# Altium PCB mipi_test_brd_t0.PcbDoc
Units mil, origin at the board's own origin, x right, y up, seen from the top; angles counter-clockwise.
Board outline 1102.36 x 1240.16 mil, 2 copper layers (Top Layer, Bottom Layer); 2 components, 11 nets, 46 pads, 142 vias.
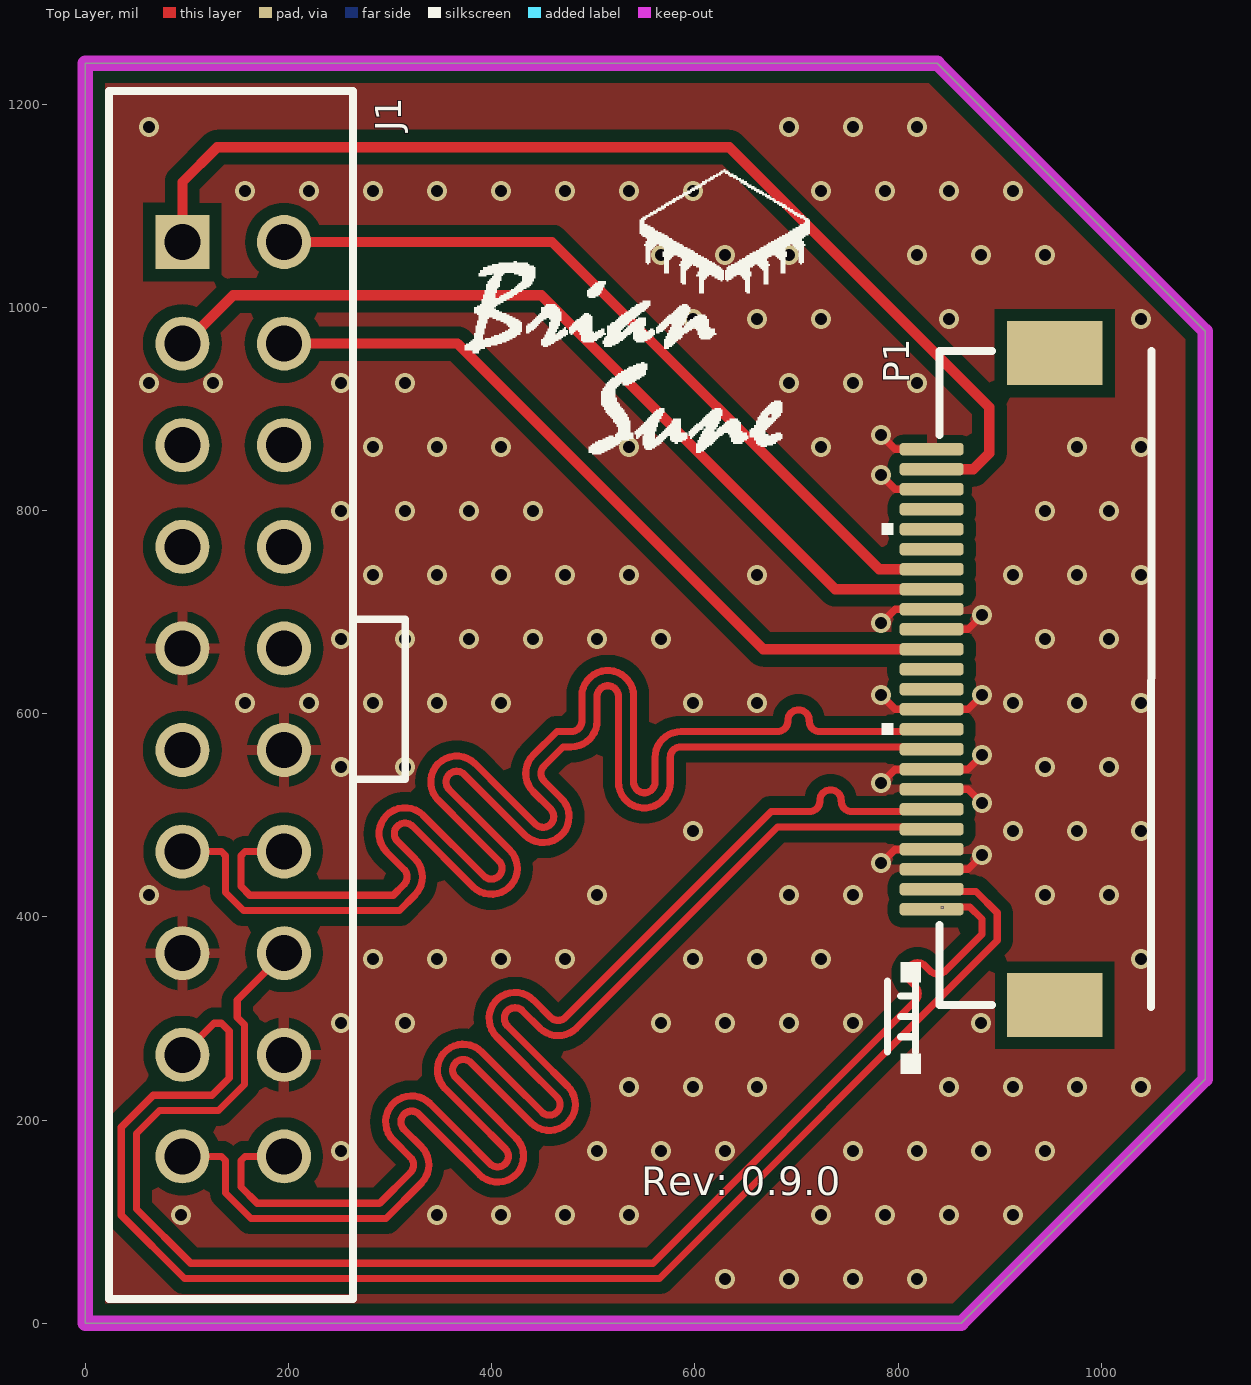
[diagram p0: Top Layer view]
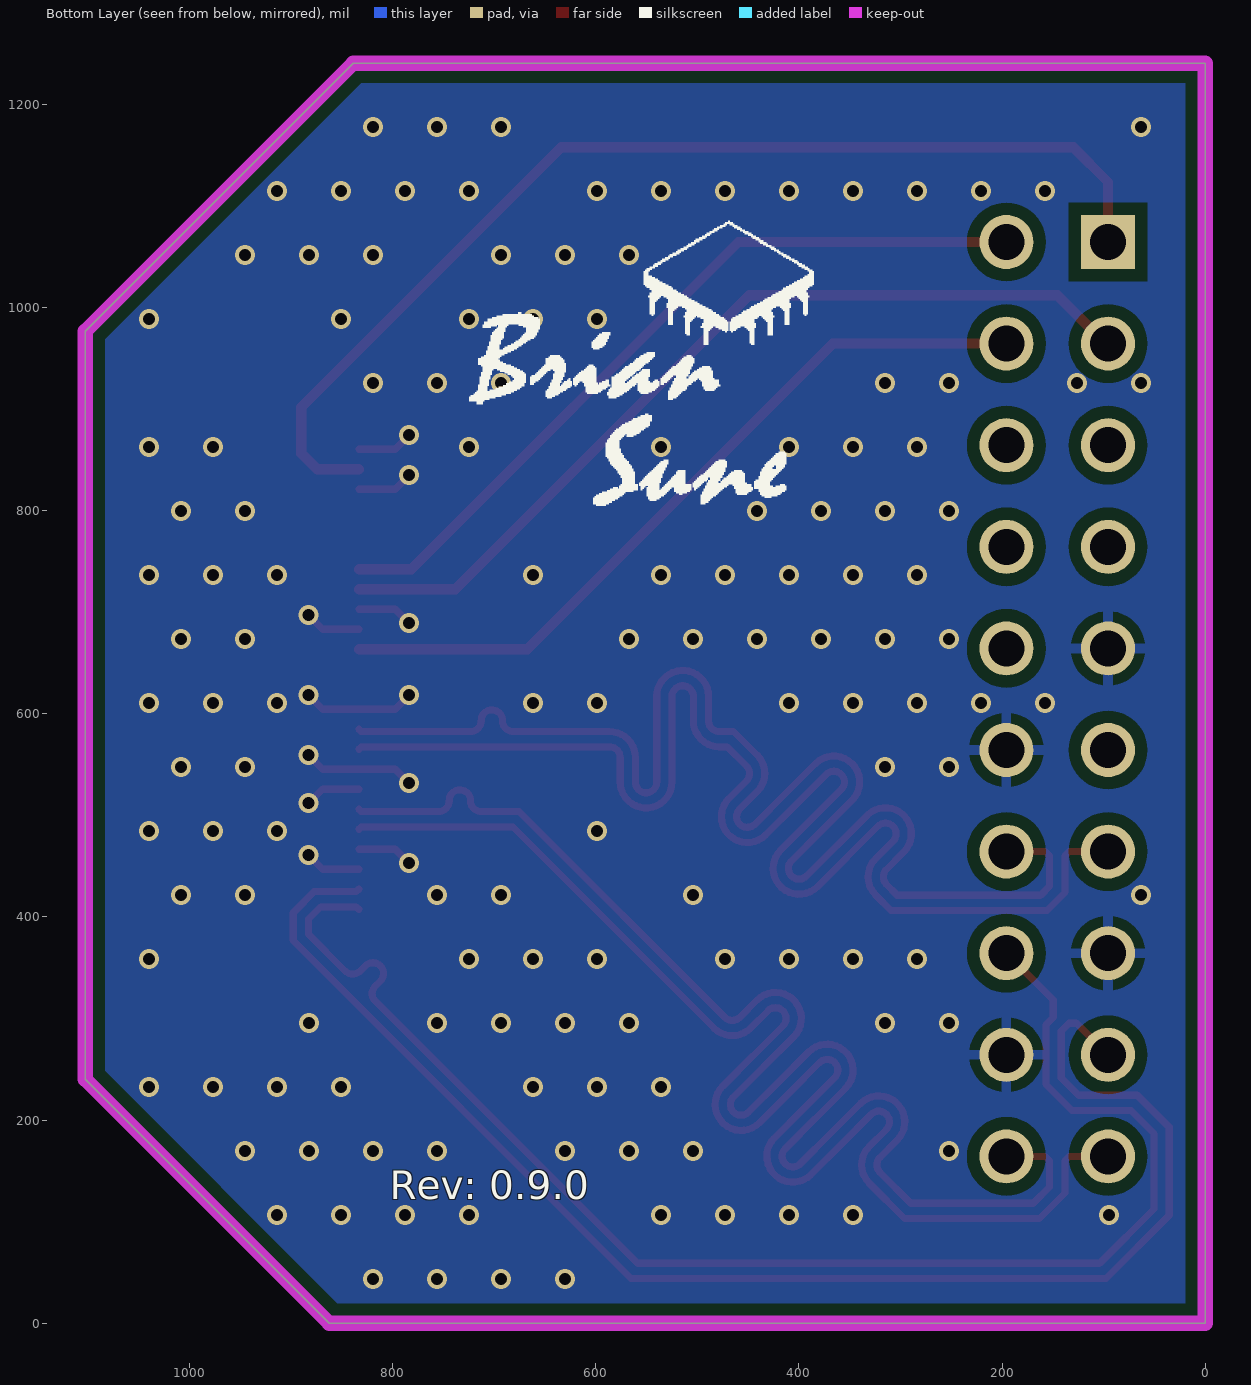
[diagram p1: Bottom Layer view, seen from below]

## Layer stack, top to bottom
Top Solder: solder mask 0.4, Solder Resist, Dk 3.5
Top Layer: signal copper 1.4
Dielectric 1: dielectric 12.6, FR-4, Dk 4.8
Bottom Layer: signal copper 1.4
Bottom Solder: solder mask 0.4, Solder Resist, Dk 3.5

## Board outline
0,0 0,1240.16 838.58,1240.16 1102.36,976.38 1102.36,240.16 862.2,0

## Design rules (kind name [scope] priority, off if disabled: settings)
Clearance [All] p1: gap=6 ignorepadtopadclearanceinfootprint=FALSE except(0: Arc-Hole Track-Hole SMDPad-Hole THPad-Hole Via-Hole Fill-Hole Poly-Hole Region-Hole Text-Hole; 8: Arc-THPad Track-THPad; 10: SMDPad-THPad; 12: Arc-Poly Track-Poly SMDPad-Poly THPad-THPad THPad-Poly Via-Poly Fill-Poly Poly-Poly)
ComponentClearance [All] p1: gap=7.87 collisioncheckmode=3 verticalgap=7.87 showdistances=FALSE
DiffPairsRouting [All] p1: maxlimit=10 minlimit=6 mostfreqgap=8 toplayer_minwidth=6 toplayer_maxwidth=15 toplayer_prefwidth=7 bottomlayer_minwidth=6 bottomlayer_maxwidth=15 bottomlayer_prefwidth=7 maxuncoupledlength=500
HoleSize [All] p1: absolutevalues=TRUE maxlimit=157.48 minlimit=3.94 maxpercent=80.000 minpercent=20.000
HoleToHoleClearance [All] p1: gap=6 allowstackedmicrovias=TRUE
MatchedLengths MatchedLengths_1 [InNetClass('MIPI_SIG')] p1: tolerance=3 checknetsindiffpair=TRUE checkdiffpairvsdiffpair=FALSE checkxsignals=FALSE checkothers=FALSE
MatchedLengths [InNetClass('MIPI_SIG')] p2: tolerance=3 checknetsindiffpair=FALSE checkdiffpairvsdiffpair=TRUE checkxsignals=TRUE checkothers=TRUE
MinimumSolderMaskSliver [All] p1: minsoldermaskwidth=3
PlaneConnect [All] p1: pad.planeconnectstyle=Relief pad.reliefexpansion=20 pad.reliefentries=4 pad.reliefconductorwidth=10 pad.reliefairgap=10 via.planeconnectstyle=Direct via.reliefexpansion=20 via.reliefentries=4 via.reliefconductorwidth=10 via.reliefairgap=10
PolygonConnect [All] p1: thpad.connectstyle=Relief thpad.reliefconductorwidth=10 thpad.reliefentries=4 thpad.polygonreliefangle="90 Angle" thpad.airgapwidth=10 smdpad.connectstyle=Relief smdpad.reliefconductorwidth=10 smdpad.reliefentries=4 smdpad.polygonreliefangle="90 Angle" smdpad.airgapwidth=8 via.connectstyle=Direct via.reliefconductorwidth=10 via.reliefentries=4 via.polygonreliefangle="90 Angle" via.airgapwidth=10
RoutingVias [All] p1: holewidth=11.81 width=19.68 viastyle="Through Hole" minholewidth=11.81 minwidth=19.68 maxholewidth=59.06 maxwidth=47.24
SilkToSilkClearance [All] p1: silktosilkclearance=6
SilkToSolderMaskClearance [IsPad] p1: minsilkscreentomaskgap=0 clearancetoexposedcopper=TRUE
SolderMaskExpansion [All] p1: expansion=1
Width [All] p1: maxlimit=40 minlimit=6 preferedwidth=6
22 further rules are at their usual default settings.

## Classes and differential pairs
net class MIPI_SIG: MIPI_CLK_N MIPI_CLK_P MIPI_D0_N MIPI_D0_P MIPI_D1_N MIPI_D1_P
differential pair MIPI_D1: +MIPI_D1_P -MIPI_D1_N
differential pair MIPI_D0: +MIPI_D0_P -MIPI_D0_N
differential pair MIPI_CLK: +MIPI_CLK_P -MIPI_CLK_N

## Components (designator, comment, footprint, x,y, rotation, side; value= is the part's Value field where it differs from the comment)
J1 "MIPI_TESTER" 20IN 145.67,614.17 r270 top
P1 "FPC_24P" fpc_24p 893.7,633.86 r90 top

## Footprints (in the part's own frame and the unit in brackets; to place one, negate y for a bottom-side part, rotate by r counter-clockwise, add the part's x,y. Pads: shape width x height; smd on the part's side, far side on the other; paste and mask are expansions set on the pad)
20IN [mm]
  rect 1.35x1.35 hole 0.9: 1(-11.43,-1.27)
  round 1.35 hole 0.9: 2(-11.43,1.27) 3(-8.89,-1.27) 4(-8.89,1.27) 5(-6.35,-1.27) 6(-6.35,1.27) 7(-3.81,-1.27) 8(-3.81,1.27) 9(-1.27,-1.27) 10(-1.27,1.27) 11(1.27,-1.27) 12(1.27,1.27) 13(3.81,-1.27) 14(3.81,1.27) 15(6.35,-1.27) 16(6.35,1.27) 17(8.89,-1.27) 18(8.89,1.27) 19(11.43,-1.27) 20(11.43,1.27)
  silkscreen extent -15.2,-3.1 15,4.3, body extent -15.09,-3 14.89,4.2, height 2.52
fpc_24p [mm]
  rrect50% 0.305x1.6 smd paste+0 mask+0: 1(-5.75,1.54) 2(-5.25,1.54) 3(-4.75,1.54) 4(-4.25,1.54) 5(-3.75,1.54) 6(-3.25,1.54) 7(-2.75,1.54) 8(-2.25,1.54) 9(-1.75,1.54) 10(-1.25,1.54) 11(-0.75,1.54) 12(-0.25,1.54) 13(0.25,1.54) 14(0.75,1.54) 15(1.25,1.54) 16(1.75,1.54) 17(2.25,1.54) 18(2.75,1.54) 19(3.25,1.54) 20(3.75,1.54) 21(4.25,1.54) 22(4.75,1.54) 23(5.25,1.54) 24(5.75,1.54)
  rect 1.6x2.388 smd: ""(-8.15,-1.54) ""(8.15,-1.54)
  silkscreen extent -9.87,-3.96 8.2,2.79, body extent -7.75,-3.8 7.75,2.1, height 2

## Part data
J1: library part 20P_MIPI
P1: Mfr.=taobao, Mfr. No=NA, ComponentLink1Description=taobao, ComponentLink1URL=https://detail.tmall.com/item.htm?_u=d10quk0kaff2&id=642914318905&spm=a1z09.2.0.0.56372e8dDu4abt&skuId=4620820056603, Price=0.33

## Via types
v1: diameter 19.68, hole 11.81, Top Layer to Bottom Layer, tented both sides, 142 vias

## Nets (pads, with @x,y where several pads share a name; then routed paths per layer and width w, separated by ;. In a path a pad name is that pad's centre, name@x,y a point inside that pad or via, vN(x,y) a via of type N, cw(c..) or ccw(c..) an arc to the next point about the centre after c; other vN are vias at no path point)
GND: J1.9 J1.12 J1.15 J1.18 P1.3 P1.4 P1.7 P1.8 P1.11 P1.15 P1.16 P1.22 P1.24 | length 608.3
  Top Layer w7: v1(783.46,452.76) 797.24,466.54 P1.4 ; v1(783.46,531.5) 797.24,545.28 P1.8 868.88,545.28 v1(882.66,559.05) ; v1(783.46,618.11) 797.24,604.33 P1.11 868.88,604.33 v1(882.66,618.11) ; v1(783.46,688.98) 797.24,702.76 P1.16 ; v1(783.46,834.65) 797.24,820.87 P1.22 ; v1(783.46,874.02) 797.24,860.24 P1.24 ; P1.3 868.88,446.85 v1(882.66,460.63) ; P1.7 868.88,525.59 v1(882.66,511.81) ; P1.15 868.88,683.07 v1(882.66,696.85)
  other v1: 629.92,43.31 692.91,43.31 755.9,43.31 818.89,43.31 94.49,106.3 346.45,106.3 409.45,106.3 472.44,106.3 535.43,106.3 724.41,106.3 787.4,106.3 850.39,106.3 913.38,106.3 251.97,169.29 503.93,169.29 566.93,169.29 629.92,169.29 755.9,169.29 818.89,169.29 881.89,169.29 944.88,169.29 535.43,232.28 598.42,232.28 661.41,232.28 850.39,232.28 913.38,232.28 976.38,232.28 1039.37,232.28 251.97,295.27 314.96,295.27 566.93,295.27 629.92,295.27 692.91,295.27 755.9,295.27 881.89,295.27 283.46,358.27 346.45,358.27 409.45,358.27 472.44,358.27 598.42,358.27 661.41,358.27 724.41,358.27 1039.37,358.27 62.99,421.26 503.93,421.26 692.91,421.26 755.9,421.26 944.88,421.26 1007.87,421.26 598.42,484.25 913.38,484.25 976.38,484.25 1039.37,484.25 251.97,547.24 314.96,547.24 944.88,547.24 1007.87,547.24 157.48,610.23 220.47,610.23 283.46,610.23 346.45,610.23 409.45,610.23 598.42,610.23 661.41,610.23 913.38,610.23 976.38,610.23 1039.37,610.23 251.97,673.23 314.96,673.23 377.95,673.23 440.94,673.23 503.93,673.23 566.93,673.23 944.88,673.23 1007.87,673.23 283.46,736.22 346.45,736.22 409.45,736.22 472.44,736.22 535.43,736.22 661.41,736.22 913.38,736.22 976.38,736.22 1039.37,736.22 251.97,799.21 314.96,799.21 377.95,799.21 440.94,799.21 944.88,799.21 1007.87,799.21 283.46,862.2 346.45,862.2 409.45,862.2 535.43,862.2 724.41,862.2 976.38,862.2 1039.37,862.2 62.99,925.2 125.98,925.2 251.97,925.2 314.96,925.2 692.91,925.2 755.9,925.2 818.89,925.2 598.42,988.19 661.41,988.19 724.41,988.19 850.39,988.19 1039.37,988.19 566.93,1051.18 629.92,1051.18 692.91,1051.18 818.89,1051.18 881.89,1051.18 944.88,1051.18 157.48,1114.17 220.47,1114.17 283.46,1114.17 346.45,1114.17 409.45,1114.17 472.44,1114.17 535.43,1114.17 598.42,1114.17 724.41,1114.17 787.4,1114.17 850.39,1114.17 913.38,1114.17 62.99,1177.16 692.91,1177.16 755.9,1177.16 818.89,1177.16
MIPI_A: J1.1 P1.23 | length 1081.8
  Top Layer w10: J1.1 95.67,1123.23 129.92,1157.48 633.86,1157.48 889.76,901.57 889.76,856.3 874.02,840.55 P1.23
MIPI_CLK_N: J1.13 P1.9 | length 1448.7
  Top Layer w7: J1.13 134.07,464.17 138.17,460.07 138.17,423.83 155.74,406.26 309.36,406.26 324.36,421.26 ccw(c306.33,439.29) 331.83,439.29 ccw(c306.33,439.29) 324.36,457.32 307.27,474.42 cw(c314.69,481.84) 307.25,489.24 ; 307.27,489.26 cw(c314.69,481.84) 322.12,489.26 381.76,429.62 ccw(c399.79,447.65) 425.29,447.65 ccw(c399.79,447.65) 417.82,465.69 388,495.51 358.18,525.33 cw(c365.61,532.75) 358.16,540.16 ; 358.18,540.18 cw(c365.61,532.75) 373.03,540.18 402.85,510.36 432.67,480.53 ccw(c450.7,498.57) 476.2,498.57 ccw(c450.7,498.57) 468.73,516.6 451.64,533.69 cw(c459.07,541.11) 451.64,548.54 470.41,567.3 478.3,567.3 ccw(c478.3,592.8) 503.8,592.8 503.8,616.98 cw(c514.3,616.98) 524.8,616.98 524.8,532.63 ccw(c550.3,532.63) 575.8,532.63 575.8,556.8 cw(c586.3,556.8) 586.3,567.3 681.1,567.3 830.72,567.3 P1.9
MIPI_CLK_P: J1.14 P1.10 | length 1448.7
  Top Layer w7: J1.14 157.27,464.17 153.17,460.07 153.17,430.05 161.96,421.26 303.15,421.26 313.75,431.86 ccw(c306.33,439.29) 316.83,439.29 ccw(c306.33,439.29) 313.76,446.72 296.66,463.81 cw(c314.69,481.84) 332.73,499.87 392.37,440.23 ccw(c399.79,447.65) 407.2,440.21 ccw(c399.79,447.65) 410.29,447.65 ccw(c399.79,447.65) 407.22,455.08 377.4,484.9 347.57,514.72 cw(c365.61,532.75) 383.64,550.78 413.46,520.96 443.28,491.14 ccw(c450.7,498.57) 458.11,491.12 ; 458.13,505.99 441.04,523.08 cw(c459.07,541.11) 441.04,559.15 464.19,582.3 478.3,582.3 ccw(c478.3,592.8) 488.8,592.8 488.8,616.98 cw(c514.3,616.98) 539.8,616.98 539.8,532.63 ccw(c550.3,532.63) 560.8,532.63 560.8,556.8 cw(c586.3,556.8) 586.3,582.3 681.1,582.3 ccw(c681.1,592.8) 691.6,592.8 691.6,593.24 cw(c702.1,593.24) 702.1,603.74 cw(c702.1,593.24) 712.6,593.24 712.6,592.8 ccw(c723.1,592.8) 723.1,582.3 744.09,582.3 830.72,582.3 P1.10 ; 458.13,491.14 ccw(c450.7,498.57) 461.2,498.57 ccw(c450.7,498.57) 458.13,505.99
MIPI_D0_N: J1.19 P1.5 | length 1448.6
  Top Layer w7: J1.19 134.07,164.17 138.17,160.07 138.17,128.02 163.08,103.11 296.02,103.11 330.71,137.8 ccw(c312.68,155.83) 338.18,155.83 ccw(c312.68,155.83) 330.71,173.86 313.78,190.78 cw(c321.21,198.21) 313.76,205.61 ; 313.78,205.63 cw(c321.21,198.21) 328.63,205.63 358.29,175.98 387.94,146.33 ccw(c405.97,164.36) 431.47,164.36 ccw(c405.97,164.36) 424,182.39 394.35,212.04 364.69,241.7 cw(c372.12,249.12) 364.67,256.52 ; 364.69,256.54 cw(c372.12,249.12) 379.54,256.54 409.19,226.89 438.85,197.24 ccw(c456.88,215.27) 482.38,215.27 ccw(c456.88,215.27) 474.91,233.3 445.26,262.95 ; 415.59,307.44 ccw(c423.03,300.03) 415.61,292.61 445.26,262.96 ; 415.61,307.46 cw(c423.03,300.03) 430.46,307.46 447.38,290.53 ccw(c465.41,308.56) 483.44,290.53 681.48,488.56 712.6,488.56 830.72,488.56 P1.5
MIPI_D0_P: J1.20 P1.6 | length 1448.7
  Top Layer w7: J1.20 157.27,164.17 153.17,160.07 153.17,134.23 169.29,118.11 289.81,118.11 320.1,148.4 ccw(c312.68,155.83) 323.18,155.83 ccw(c312.68,155.83) 320.1,163.25 303.18,180.18 cw(c321.21,198.21) 339.24,216.24 368.89,186.59 398.55,156.93 ccw(c405.97,164.36) 413.37,156.91 ; 413.4,156.93 ccw(c405.97,164.36) 416.47,164.36 ccw(c405.97,164.36) 413.4,171.78 383.74,201.43 354.09,231.09 cw(c372.12,249.12) 390.15,267.15 419.8,237.5 449.46,207.84 ccw(c456.88,215.27) 464.29,207.82 ccw(c456.88,215.27) 467.38,215.27 ccw(c456.88,215.27) 464.31,222.69 434.66,252.34 405,282 cw(c423.03,300.03) 441.06,318.06 457.99,301.14 ccw(c465.41,308.56) 472.84,301.14 675.26,503.56 712.6,503.56 ccw(c712.6,514.06) 723.1,514.06 723.1,514.5 cw(c733.6,514.5) 733.6,525 cw(c733.6,514.5) 744.1,514.5 744.1,514.06 ccw(c754.6,514.06) 754.6,503.56 771.65,503.56 830.72,503.56 P1.6
MIPI_D1_N: J1.16 P1.1 | length 1448.8
  Top Layer w7: J1.16 149.61,318.11 149.61,300.95 156.73,293.83 156.73,235.11 131.03,209.41 73.14,209.41 50.43,186.7 50.43,112.51 103.89,59.06 558.91,59.06 816.86,317 ccw(c809.43,324.43) 816.86,331.85 811.87,336.84 cw(c819.29,344.26) 811.87,351.69 cw(c819.29,344.26) 826.72,351.69 831.71,346.7 ccw(c839.13,354.12) 846.56,346.7 882.66,382.8 882.66,397.84 870.67,409.82 835.4,409.82 P1.1
MIPI_D1_P: J1.17 P1.2 | length 1448.8
  Top Layer w7: J1.17 126.77,295.28 134.07,295.28 141.73,287.61 141.73,241.33 124.81,224.41 66.93,224.41 35.43,192.91 35.43,106.3 97.68,44.06 565.12,44.06 897.66,376.59 897.66,404.05 876.88,424.82 835.4,424.82 P1.2
MIPI_RST: J1.4 P1.14 | length 762
  Top Layer w10: J1.4 366.54,964.17 667.32,663.39 P1.14
VCC: J1.2 P1.18 | length 770.8
  Top Layer w10: J1.2 459.45,1064.17 781.5,742.13 P1.18
VIO: J1.3 P1.17 | length 877
  Top Layer w10: J1.3 98.03,964.17 145.67,1011.81 448.82,1011.81 738.19,722.44 P1.17
pads on no net: J1.5 J1.6 J1.7 J1.8 J1.10 J1.11 P1. P1.12 P1.13 P1.19 P1.20 P1.21

## Polygon pours and split planes (outlines as drawn)
GND on Top Layer "GND_L01_P000" (solid, remove dead copper, pour order 0): 0.24,1240.25 838.82,1240.25 1102.6,976.47 1102.6,240.25 862.45,0.09 0.24,0.09
GND on Bottom Layer "GND_L02_P002" (solid, remove dead copper, pour order 2): 0,1240.16 838.58,1240.16 1102.36,976.38 1102.36,240.16 862.2,0 0,0

## Keep-outs
Keep-Out Layer:
  the board outline again, w15

## Silkscreen, mask and mechanical layers (free items; w line width, h text height)
Top Overlay:
  drawing of 11 lines, arcs and shapes, not listed
  text "Rev: 0.9.0" at 547.24,125.98 h28
Bottom Overlay:
  drawing of 11 lines, arcs and shapes, not listed
  text "Rev: 0.9.0" at 802.85,122.05 h28